# EAGLE board Esquema (EAGLE 9.6.2)
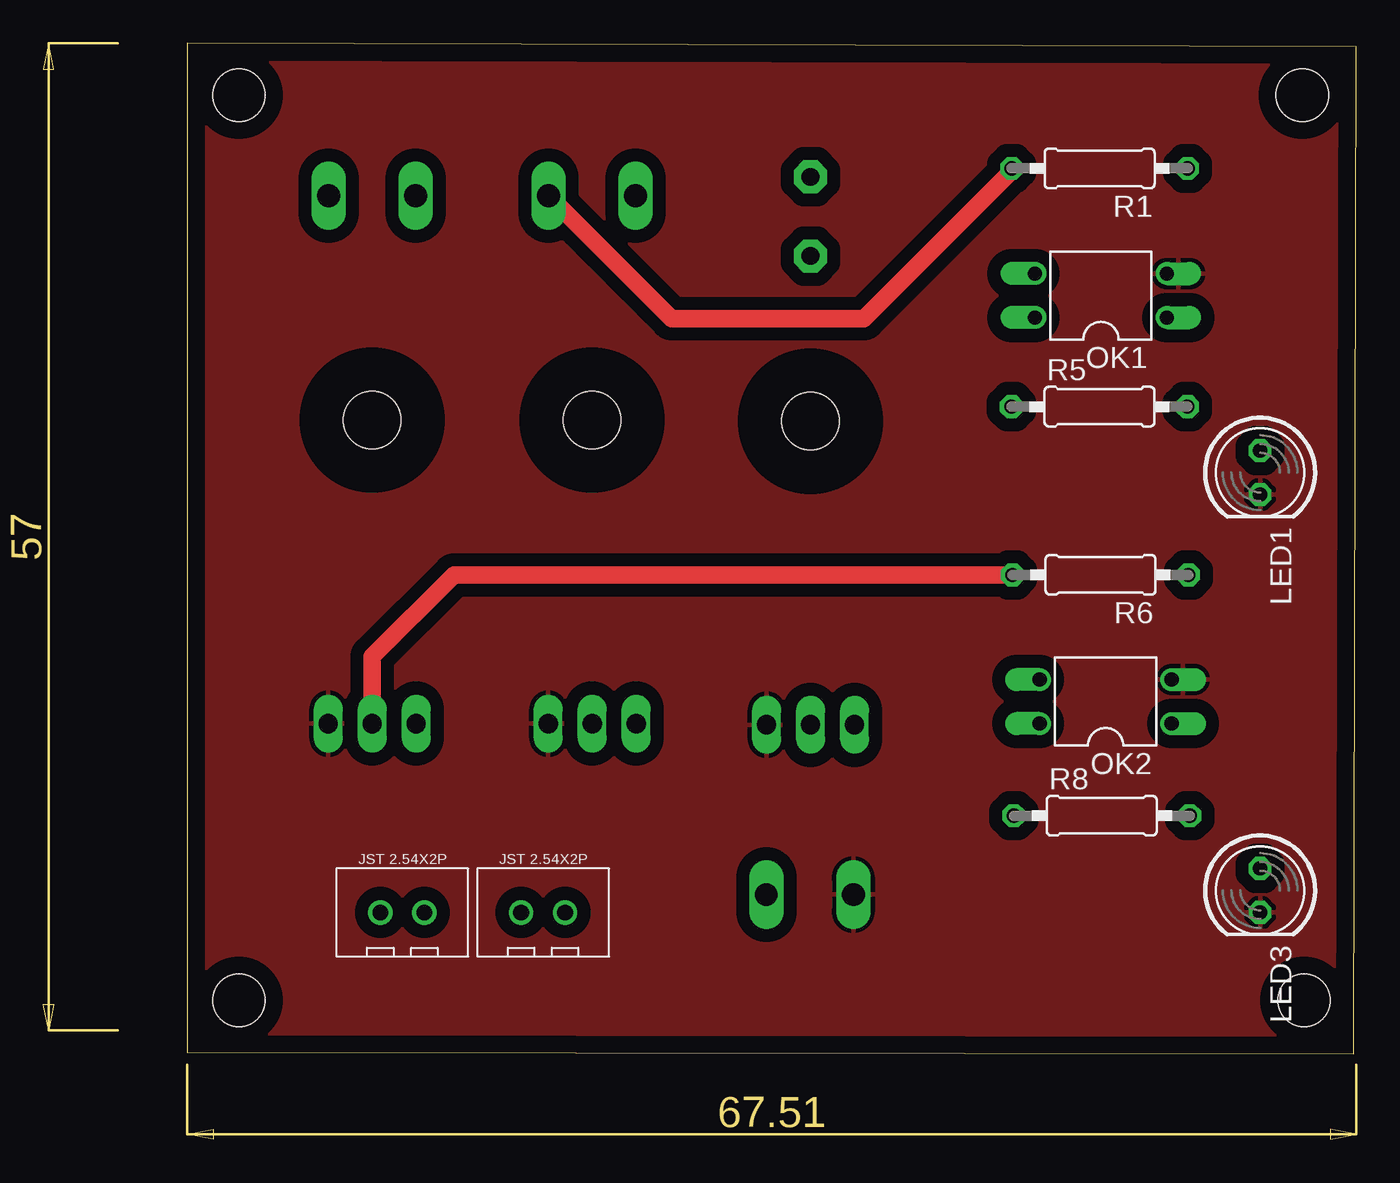
[diagram p0: board, top side]
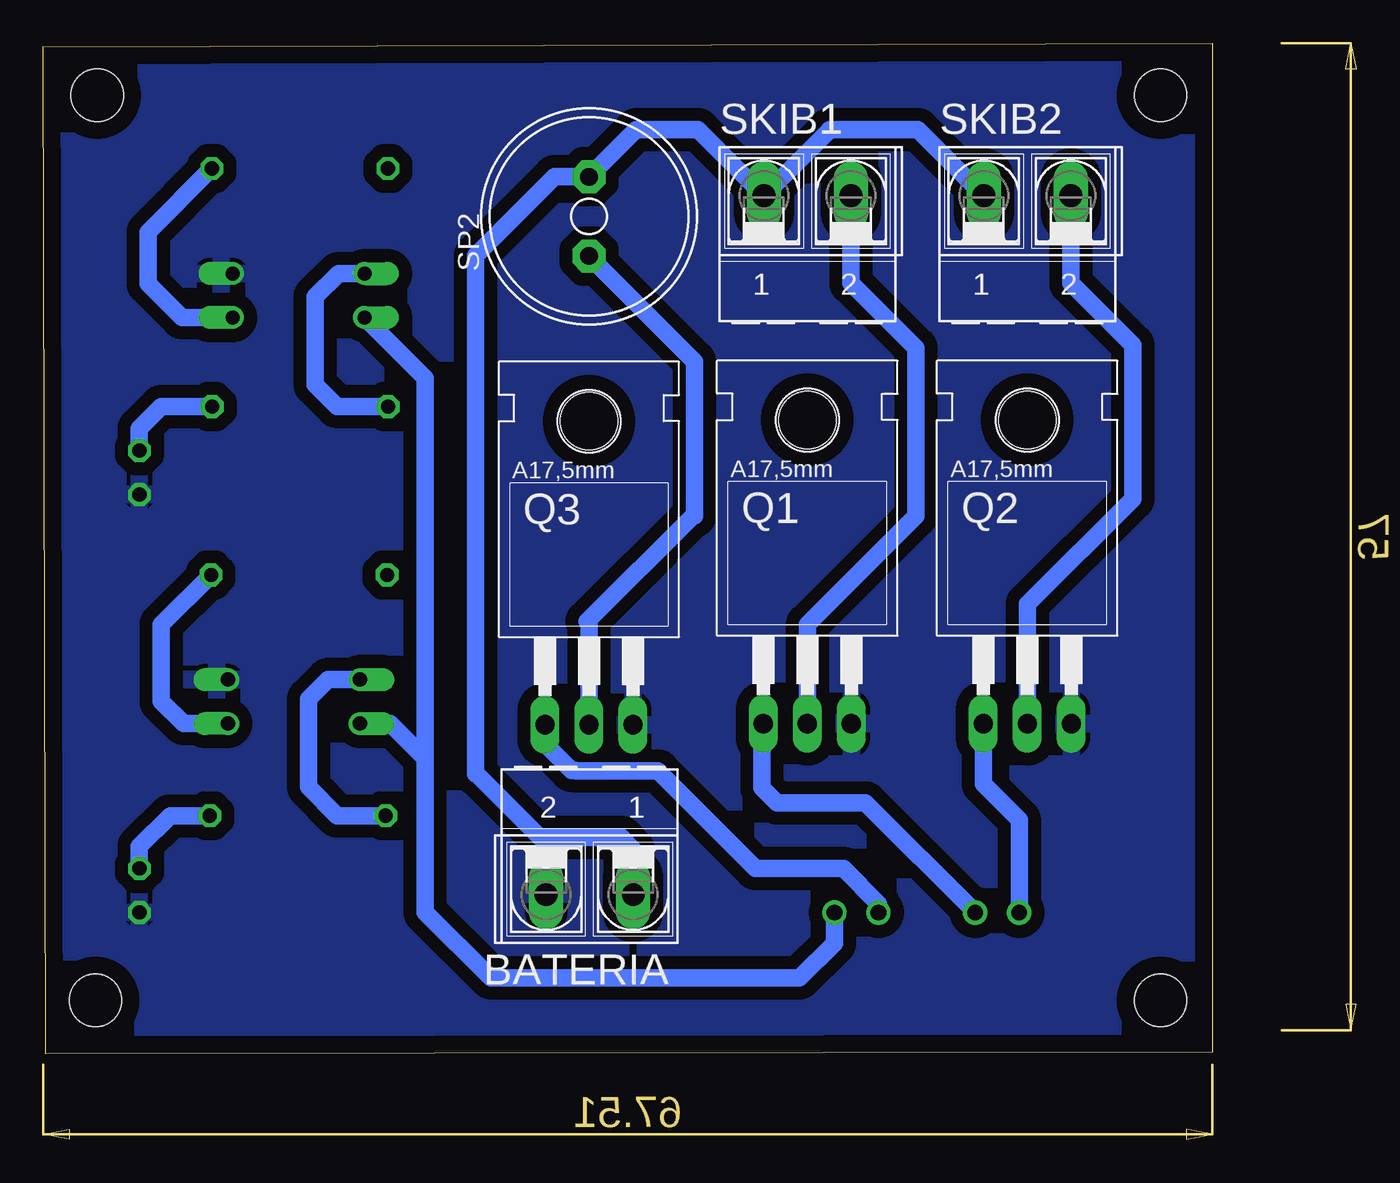
[diagram p1: board, bottom side, seen from below]

Size 67.5 x 58.34 mm. Coordinates in mm from the lower left corner, seen from the top.
Outline: 0,0.07 67.37,0 67.5,58.14 0,58.34 0,0.07
Copper layers (1*16): Top 0.035mm / dielectric 1.5mm / Bottom 0.035mm
Design rules "default *": minimum track width 1mm, minimum drill 0.35mm, track to track 30mil, track to pad 0.5mm, pad to pad 6mil, via to via 6mil, smd to smd 6mil, copper to edge 40mil, drill to drill 6mil, minimum pad ring 10mil, minimum via ring 8mil, stop-mask expansion 4mil, vias tented up to drill 0mil, thermal gap 10mil
Holes 3 mm at 64.4,55.34 3,55.34 64.5,3.07 3,3.07

## Footprints (pad centres in the part's own frame; a part is rotated, then mirrored left to right if it is on the bottom)
AK500/2-H = drill 1.321 long: 1 -2.515,0; 2 2.515,0
LED5MM = drill 0.813 octagon: A -1.27,0; K 1.27,0
DIL04 = drill 0.813 offset: 1 -1.27,-3.81; 2 1.27,-3.81; 3 1.27,3.81; 4 -1.27,3.81
TO220 = drill 1.118 long: 1 -2.54,-6.35; 2 0,-6.35; 3 2.54,-6.35 | hole 3.302: 0,11.176
0207/10 = drill 0.813 octagon: 1 -5.08,0; 2 5.08,0
AL11P = drill 1.016 pad 1.905 octagon: + 2.286,0; - -2.286,0
JST2.54X2P_FOOTPRINT = drill 0.9: 1 -1.27,0; 2 1.27,0

## Placement (x,y rotation side)
BATERIA  [AK500/2-H]  35.96,9.18 180 bottom
LED1  5mm  [LED5MM]  61.96,33.55 270 top
LED3  5mm  [LED5MM]  61.96,9.42 270 top
OK1  PC817  [DIL04]  52.77,43.78 90 top
OK2  PC817  [DIL04]  53.04,20.33 90 top
Q1  IRF540  [TO220]  23.39,25.41 0 bottom
Q2  IRF540  [TO220]  10.69,25.41 0 bottom
Q3  IRF540  [TO220]  36,25.34 0 bottom
R1  220  [0207/10]  52.69,51.12 180 top
R2  1k  [0207/10]  83.7,12.8 0 top  (outside the outline)
R3  1k  [0207/10]  83.7,8.2 0 top  (outside the outline)
R4  1k  [0207/10]  83.7,3.6 0 top  (outside the outline)
R5  220  [0207/10]  52.69,37.36 0 top
R6  1k  [0207/10]  52.75,27.65 180 top
R8  220  [0207/10]  52.82,13.74 0 top
SKIB1  [AK500/2-H]  23.39,49.54 0 bottom
SKIB2  [AK500/2-H]  10.69,49.54 0 bottom
SP2  AL11P  [AL11P]  36,48.34 90 bottom
U$1  JST2.54X2P  [JST2.54X2P_FOOTPRINT]  20.56,8.15 0 top
U$2  JST2.54X2P  [JST2.54X2P_FOOTPRINT]  12.43,8.15 0 top

## Library data of the parts
BATERIA SKIB1 SKIB2 = con-ptr500; OC_FARNELL: unknown; OC_NEWARK: unknown
LED1 LED3 = led
OK1 OK2 = optocoupler; MPN: PC817X4J000F; OC_FARNELL: 9707727; OC_NEWARK: 97K7059
Q1-Q3 = transistor-fet
R1-R6 R8 = rcl; SPICEPREFIX: R
SP2 = buzzer; OC_FARNELL: unknown; OC_NEWARK: unknown
U$1 U$2 = CRD

## Nets
3.3V: OK1.4 OK2.4 U$1.2
BUZZER: Q3.1 U$1.1
GND: BATERIA.2 LED1.K LED3.K OK1.2 OK2.2 Q1.3 Q2.3 Q3.3
N$2: Q3.2 SP2.-
N$3: LED3.A R8.2
N$4: OK1.1 R1.1
N$5: OK2.1 R6.1
N$6: LED1.A R5.2
SINAL_SKIB1: OK1.3 R5.1
SINAL_SKIB2: OK2.3 R8.1
SKIB1: Q1.1 U$2.2
SKIB1_CONECTOR: Q1.2 R1.2 SKIB1.2
SKIB2: Q2.1 U$2.1
SKIB2_CONECTOR: Q2.2 R6.2 SKIB2.2
VCC: BATERIA.1 SKIB1.1 SKIB2.1 SP2.+

## Tracks (layer width: path | path; a pad name or v marks a point on that pad's centre or on a via)
3.3V
  Bottom 1: OK1.4 45.45,39 45.45,17.04 | 45.45,17.04 45.45,8.15 41.66,4.37 23.84,4.37 21.83,6.38 U$1.2 | 45.45,17.04 47.47,19.06 OK2.4
BUZZER
  Bottom 1: Q3.1 38.54,17.88 37,16.34 36.79,16.34 36.76,16.32 32.02,16.32 26.4,10.69 21.32,10.69 19.29,8.66 U$1.1
GND
  pour Bottom: 1,57.34 1,1.07 66.7,1.07 66.7,57.34
  pour Top: -0.27,0.53 67.04,0.53 67.04,57.68 -0.27,57.68
N$2
  Bottom 1: SP2.- 29.9,39.96 29.9,31.04 30,31.04 36.1,24.94 36,24.84 Q3.2
N$3
  Bottom 1: R8.2 60.18,13.74 61.96,11.96 LED3.A
N$4
  Bottom 1: OK1.1 59.49,42.51 61.45,44.47 61.45,46.76 61.45,47.44 R1.1
N$5
  Bottom 1: OK2.1 59.41,19.06 60.69,20.34 60.69,23.39 60.69,24.79 R6.1
N$6
  Bottom 1: R5.2 60.69,37.36 61.96,36.09 LED1.A
SINAL_SKIB1
  Bottom 1: OK1.3 50.46,45.05 51.8,43.71 51.8,38.63 50.53,37.36 R5.1
SINAL_SKIB2
  Bottom 1: OK2.3 51.05,21.6 52.18,20.47 52.18,15.39 50.53,13.74 R8.1
SKIB1
  Bottom 1: Q1.1 26,18.99 26,15.34 25.14,14.49 20.04,14.49 U$2.2
SKIB1_CONECTOR
  Top 1: SKIB1.2 27.98,42.44 39.1,42.44 47.61,50.96 R1.2
  Bottom 1: Q1.2 23.39,24.79 17.13,31.05 17.13,40.74 20.88,44.49 SKIB1.2
SKIB2
  Bottom 1: Q2.1 13.23,15.57 11.16,13.5 U$2.1
SKIB2_CONECTOR
  Top 1: Q2.2 10.69,22.92 15.42,27.65 R6.2
  Bottom 1: Q2.2 10.69,25.95 4.61,32.03 4.61,40.92 8.18,44.49 SKIB2.2
VCC
  Bottom 1: SKIB2.1 17.02,53.35 22.12,53.35 22.12,53.33 SKIB1.1 29.7,53.34 33.29,53.34 SP2.+ 38,50.63 42.54,46.09 42.54,16.14 42.5,16.14 38.83,12.47 34.13,12.47 33.45,11.79 BATERIA.1